# EAGLE board asomator2 (EAGLE 7.7.0)
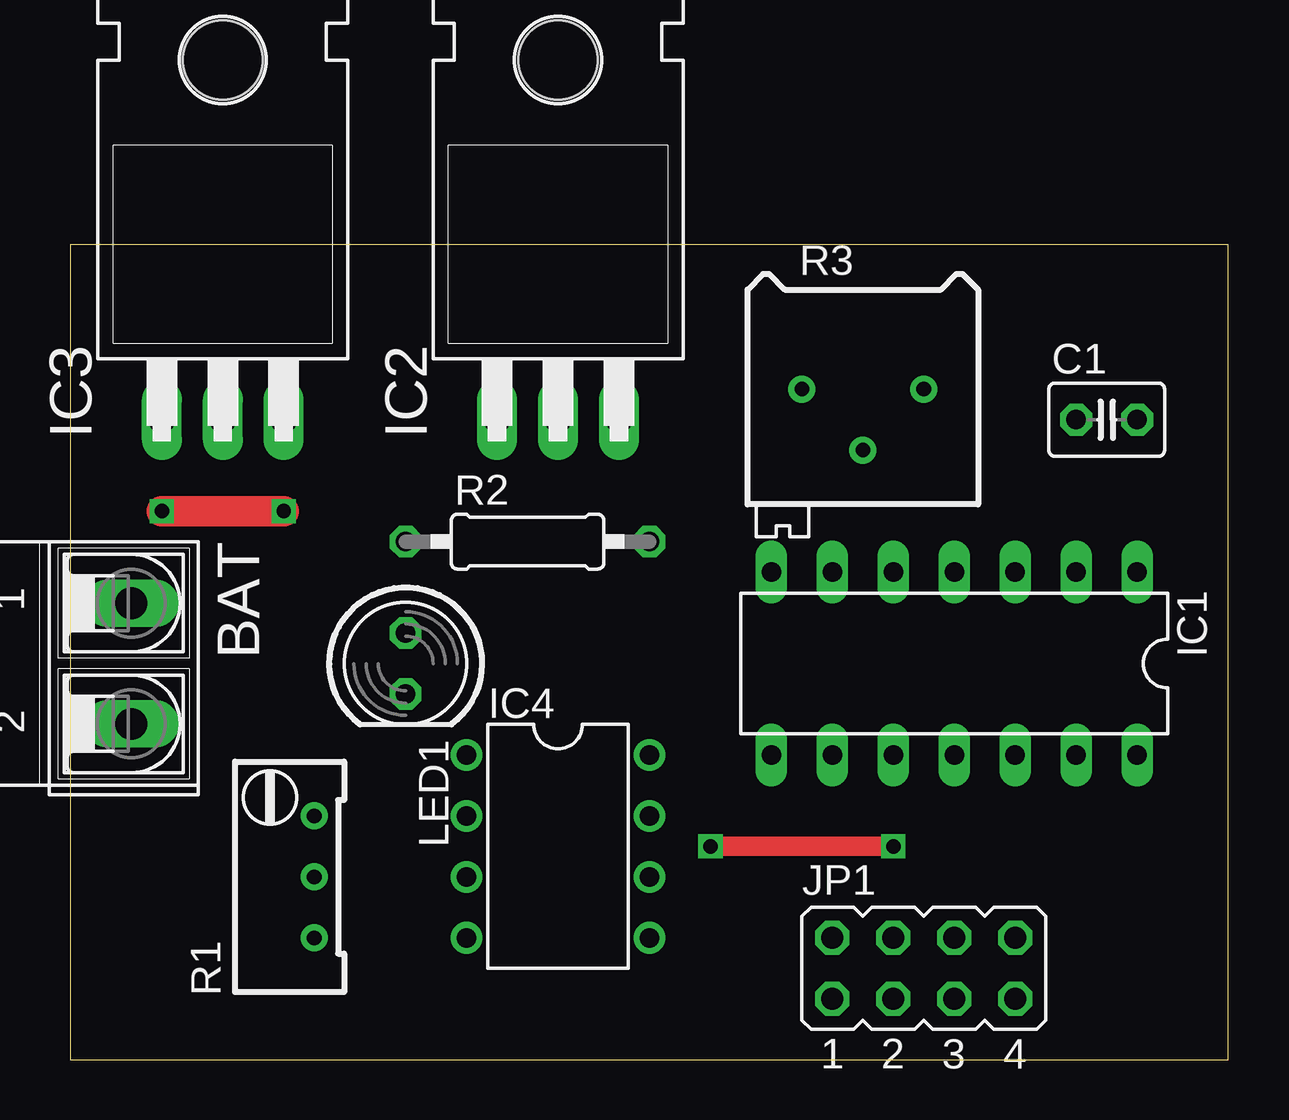
[diagram p0: board, top side]
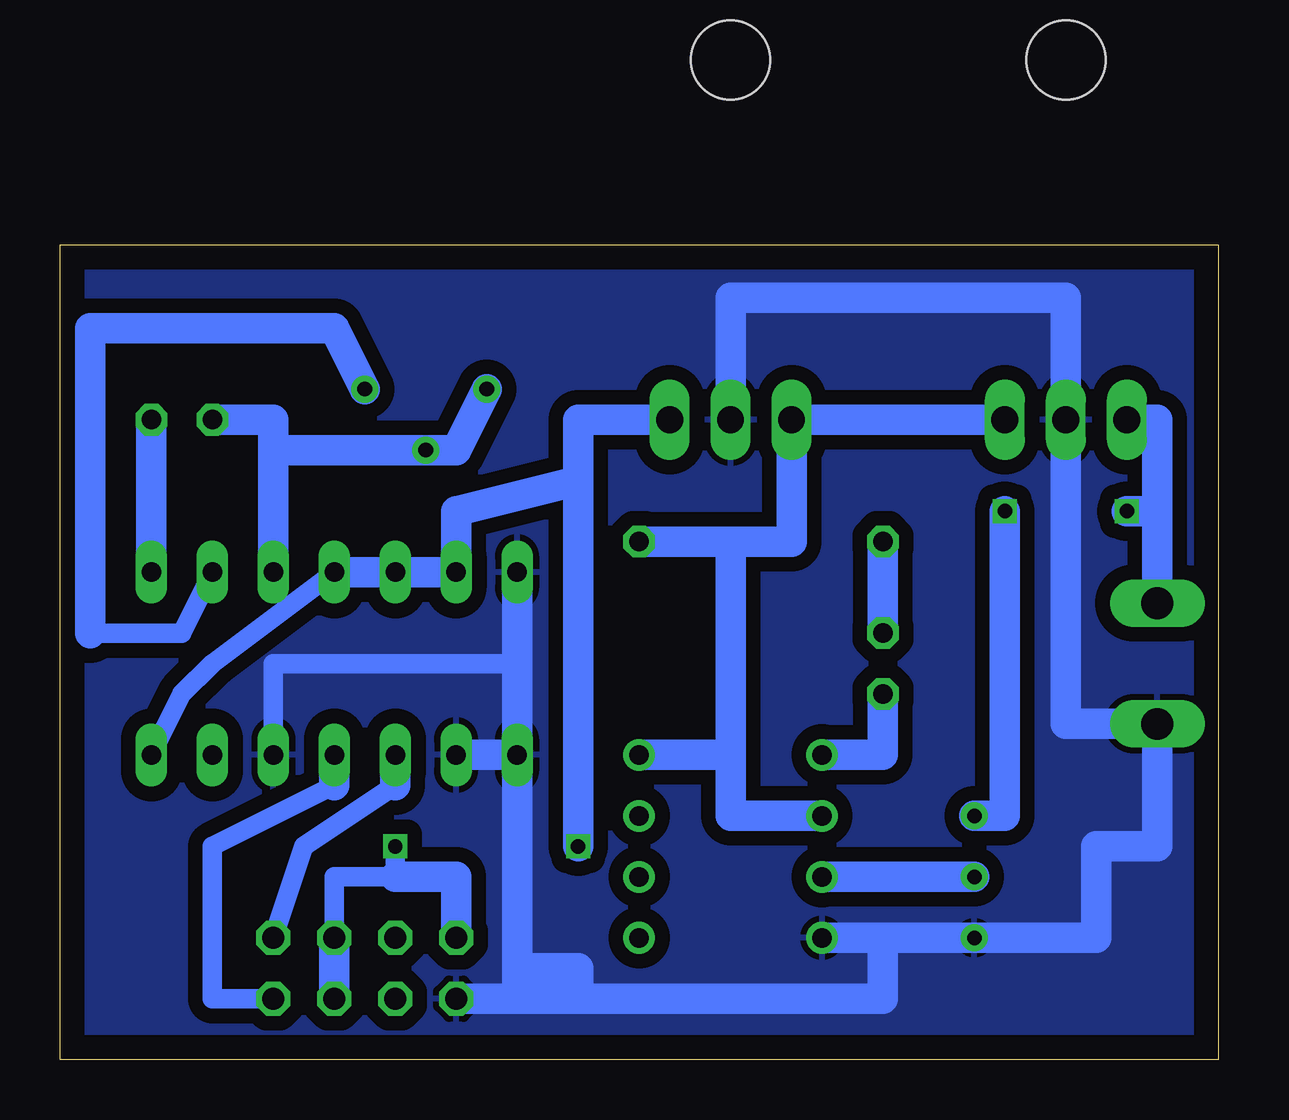
[diagram p1: board, bottom side, seen from below]

Size 48.24 x 33.96 mm. Coordinates in mm from the lower left corner, seen from the top.
Outline: 0,0 48.24,0 48.24,33.96 0,33.96 0,0
Copper layers (1*16): Top 0.035mm / dielectric 1.5mm / Bottom 0.035mm
Design rules "default": minimum track width 10mil, minimum drill 24mil, track to track 8mil, track to pad 8mil, pad to pad 8mil, via to via 8mil, smd to smd 8mil, copper to edge 40mil, drill to drill 8mil, minimum pad ring 10mil, minimum via ring 8mil, stop-mask expansion 4mil, vias tented up to drill 0mil, thermal gap 10mil

## Footprints (pad centres in the part's own frame; a part is rotated, then mirrored left to right if it is on the bottom)
AK500/2-H = drill 1.321 long: 1 -2.515,0; 2 2.515,0
C025-030X050 = drill 0.813 octagon: 1 -1.27,0; 2 1.27,0
DIL14 = drill 0.813 long: 1 -7.62,-3.81; 2 -5.08,-3.81; 3 -2.54,-3.81; 4 0,-3.81; 5 2.54,-3.81; 6 5.08,-3.81; 7 7.62,-3.81; 8 7.62,3.81; 9 5.08,3.81; 10 2.54,3.81; 11 0,3.81; 12 -2.54,3.81; 13 -5.08,3.81; 14 -7.62,3.81
TO220H = drill 1.118 long: 1 -2.54,-10.16; 2 0,-10.16; 3 2.54,-10.16 | hole 3.302: 0,4.826
DIL08 = drill 0.813 pad 1.27: 1 -3.81,-3.81; 2 -1.27,-3.81; 3 1.27,-3.81; 4 3.81,-3.81; 5 3.81,3.81; 6 1.27,3.81; 7 -1.27,3.81; 8 -3.81,3.81
JP4Q = drill 0.914 octagon: 1 -3.81,-1.27; 2 -3.81,1.27; 3 -1.27,-1.27; 4 -1.27,1.27; 5 1.27,-1.27; 6 1.27,1.27; 7 3.81,-1.27; 8 3.81,1.27
LED5MM = drill 0.813 octagon: A -1.27,0; K 1.27,0
RTRIM64W = drill 0.61: 1 1.27,-2.54; 2 1.27,0; 3 1.27,2.54
0207/10 = drill 0.813 octagon: 1 -5.08,0; 2 5.08,0
RTRIM64P = drill 0.61: 1 0,-2.54; 2 2.54,0; 3 0,2.54

## Placement (x,y rotation side)
BAT  [AK500/2-H]  2.54,16.51 270 top
C1  [C025-030X050]  43.18,26.67 0 top
IC1  4047N  [DIL14]  36.83,16.51 180 top
IC2  7805T  [TO220H]  20.32,36.83 0 top
IC3  7812T  [TO220H]  6.35,36.83 0 top
IC4  LM358N  [DIL08]  20.32,8.89 270 top
JP1  [JP4Q]  35.56,3.81 0 top
LED1  [LED5MM]  13.97,16.51 270 top
R1  [RTRIM64W]  8.89,7.62 0 top
R2  [0207/10]  19.05,21.59 0 top
R3  [RTRIM64P]  33.02,27.94 270 top

## Library data of the parts
BAT = con-ptr500; OC_FARNELL: unknown; OC_NEWARK: unknown
C1 R1 R2 = rcl
IC1 = 40xx
IC2-IC4 = linear
JP1 = jumper
LED1 = led
R3 = resistor

## Nets
+5V: IC1.4 IC1.5 IC1.6 IC1.14 IC2.3 JP1.2 JP1.5 JP1.6
+12V: IC2.1 IC3.3 IC4.2 IC4.8 R2.2
+18V: BAT.1 IC3.1 R1.3
GND: BAT.2 IC1.7 IC1.8 IC1.9 IC1.12 IC2.2 IC3.2 IC4.4 JP1.1 R1.1
N$1: IC1.10 JP1.8
N$2: LED1.A R2.1
N$3: IC1.11 JP1.7
N$4: IC4.1 LED1.K
N$5: IC4.3 R1.2
N$7: IC1.2 R3.3
N$8: C1.2 IC1.1
N$9: C1.1 IC1.3 R3.1 R3.2

## Tracks (layer width: path | path; a pad name or v marks a point on that pad's centre or on a via)
+5V  (via drill 0.6)
  Top 0.813: v34.29,8.89 v26.67,8.89
  Bottom 0.813: IC1.4 41.91,16.51 43.18,15.24 IC1.14 | JP1.6 36.83,7.62 34.29,7.62 v34.29,8.89
  Bottom 1.27: IC2.3 26.67,26.67 26.67,24.13 | 26.67,24.13 31.75,22.86 IC1.6 IC1.5 IC1.4 | JP1.6 JP1.5 | v26.67,8.89 26.67,24.13 | JP1.2 31.75,7.62 34.29,7.62
+12V
  Bottom 1.27: IC3.3 IC2.1 17.78,21.59 20.32,21.59 | IC4.2 20.32,10.16 20.32,12.7 | 20.32,12.7 IC4.8 | 20.32,21.59 20.32,12.7 | 20.32,21.59 R2.2
+18V  (via drill 0.6)
  Top 1.27: v8.89,22.86 v3.81,22.86
  Bottom 1.27: IC3.1 2.54,26.67 2.54,22.86 | 2.54,22.86 BAT.1 | R1.3 8.89,10.16 v8.89,22.86 | v3.81,22.86 2.54,22.86
GND
  Bottom 0.813: IC1.12 39.37,16.51 29.21,16.51
  Bottom 1.27: IC2.2 20.32,31.75 6.35,31.75 IC3.2 6.35,13.99 BAT.2 2.54,8.89 5.08,8.89 5.08,5.08 R1.1 13.97,5.08 | 13.97,5.08 IC4.4 | JP1.1 29.21,2.54 | 29.21,2.54 26.67,2.54 | 26.67,2.54 13.97,2.54 13.97,5.08 | IC1.7 29.21,16.51 IC1.8 | IC1.8 29.21,3.81 | 29.21,3.81 29.21,2.54 | IC1.8 IC1.9 | 26.67,2.54 26.67,3.81 29.21,3.81
  pour Bottom (isolate 0.61): 0,0 48.26,0 48.26,34.29 0,34.29
N$1
  Bottom 0.813: 34.29,11.43 38.1,8.89 JP1.8
  Bottom 1.27: IC1.10 34.29,11.43
N$2
  Bottom 1.27: LED1.A R2.1
N$3
  Bottom 0.813: 36.83,11.43 41.91,8.89 41.91,2.54 JP1.7
  Bottom 1.27: IC1.11 36.83,11.43
N$4
  Bottom 1.27: IC4.1 13.97,12.7 LED1.K
N$5
  Bottom 1.27: R1.2 IC4.3
N$7
  Bottom 0.813: 46.99,17.78 43.18,17.78 IC1.2
  Bottom 1.27: R3.3 36.83,30.48 46.99,30.48 46.99,17.78
N$8
  Bottom 1.27: C1.2 IC1.1
N$9
  Bottom 1.27: R3.1 31.75,25.4 R3.2 39.37,25.4 | C1.1 39.37,26.67 39.37,25.4 | 39.37,25.4 IC1.3